# EAGLE board sparkfun-photon-redboard-Panel (EAGLE 9.6.2), part 1 of 3
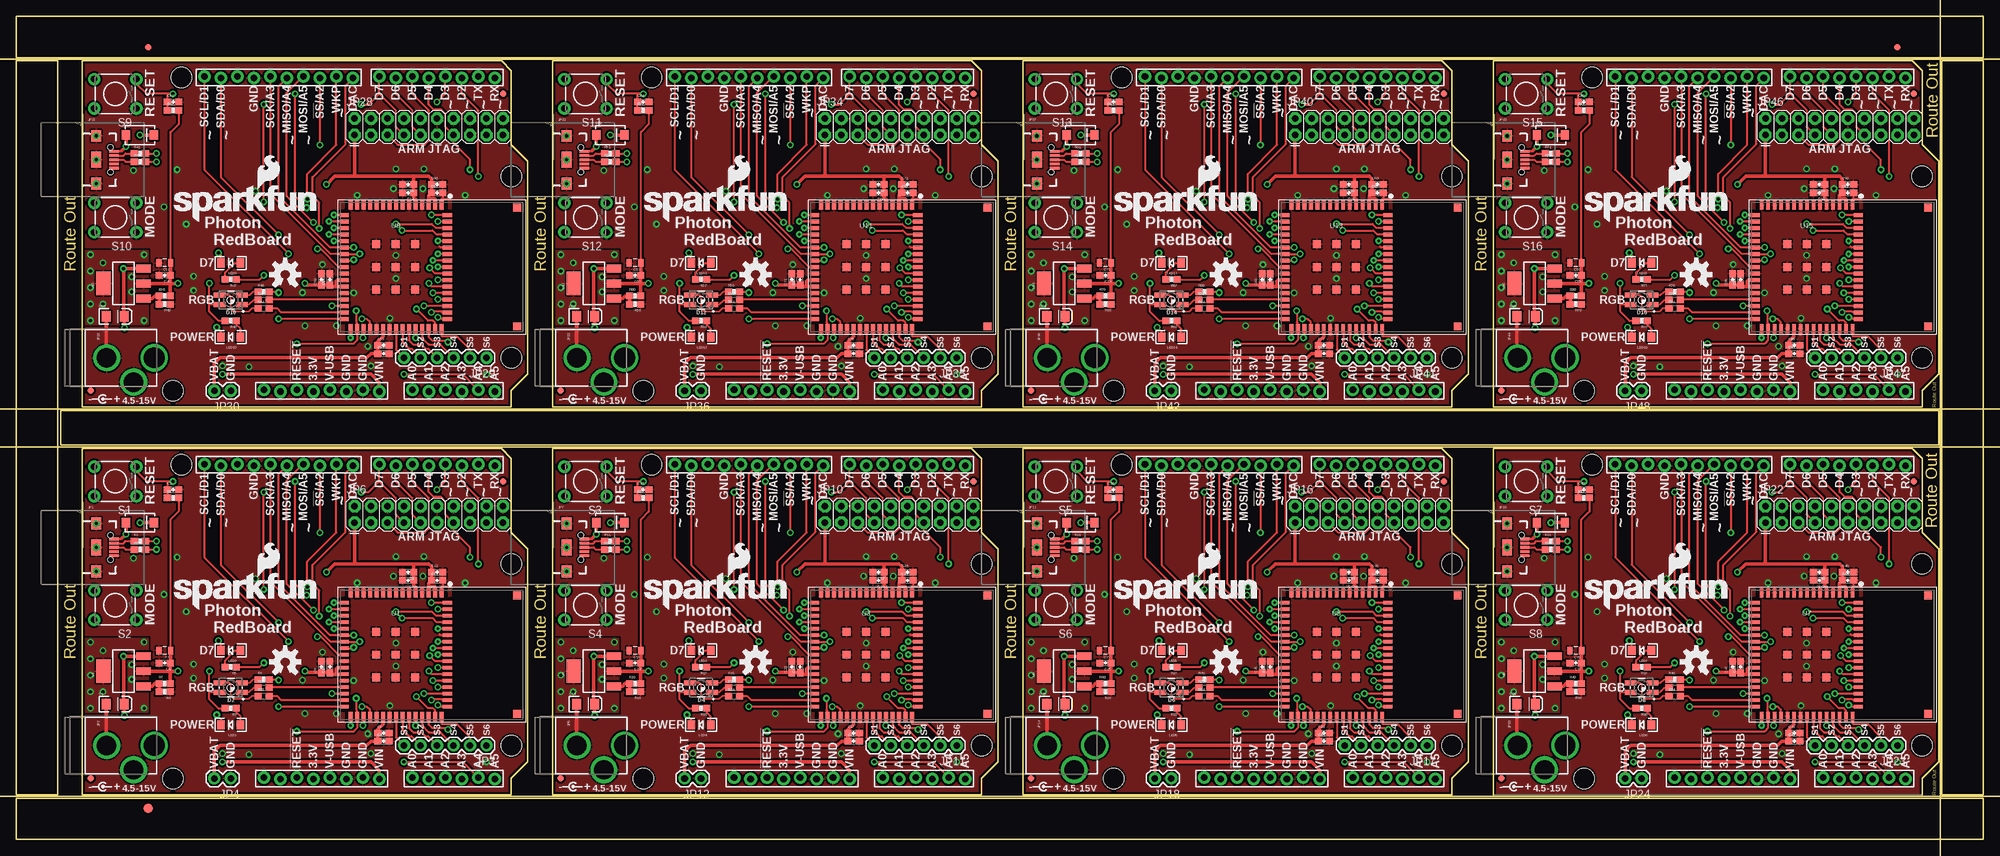
[diagram p0: board, top side]
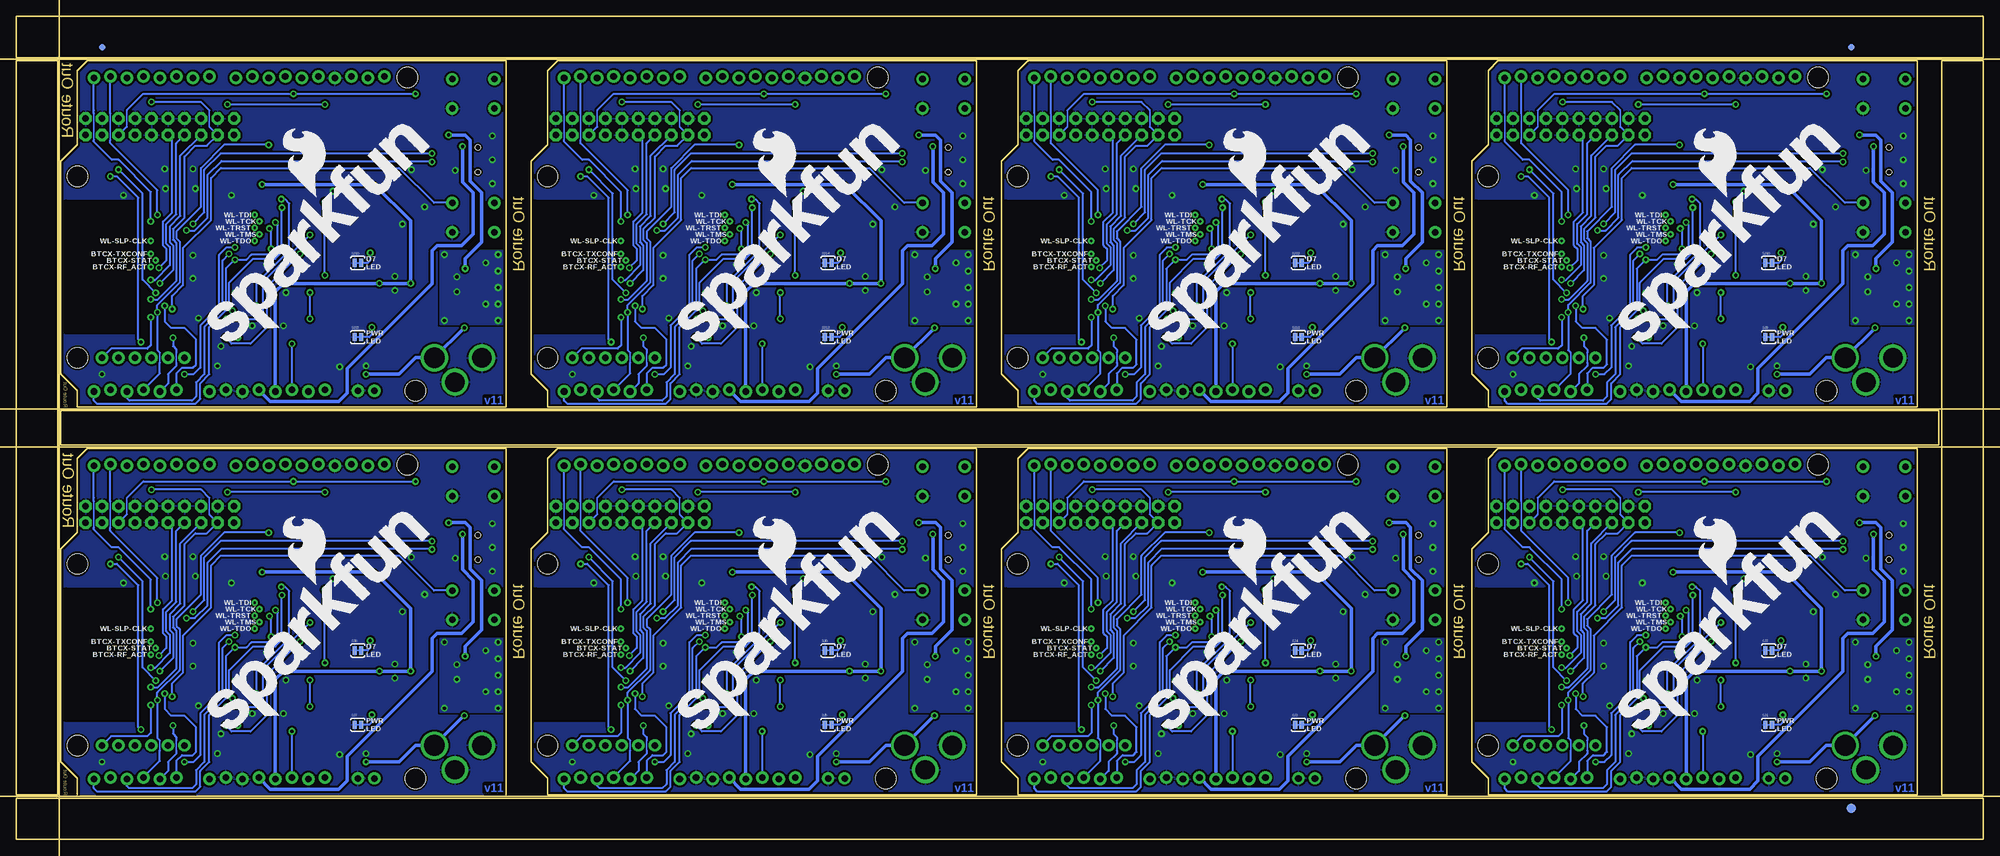
[diagram p1: board, bottom side, seen from below]

Size 302.77 x 126.75 mm. Coordinates in mm from the lower left corner, seen from the top.
Outline: 227.33,6.86 227.33,60.2 291.85,60.2 293.37,58.67 293.37,47.24 295.91,44.7 295.91,11.94 293.37,9.4 293.37,6.86
Outline: 10.16,6.86 10.16,60.2 74.68,60.2 76.2,58.67 76.2,47.24 78.74,44.7 78.74,11.94 76.2,9.4 76.2,6.86 10.16,6.86
Outline: 82.55,6.86 82.55,60.2 147.07,60.2 148.59,58.67 148.59,47.24 151.13,44.7 151.13,11.94 148.59,9.4 148.59,6.86 82.55,6.86
Outline: 154.94,6.86 154.94,60.2 219.46,60.2 220.98,58.67 220.98,47.24 223.52,44.7 223.52,11.94 220.98,9.4 220.98,6.86 154.94,6.86
Outline: 10.16,66.55 10.16,119.89 74.68,119.89 76.2,118.36 76.2,106.93 78.74,104.39 78.74,71.63 76.2,69.09 76.2,66.55 10.16,66.55
Outline: 82.55,66.55 82.55,119.89 147.07,119.89 148.59,118.36 148.59,106.93 151.13,104.39 151.13,71.63 148.59,69.09 148.59,66.55 82.55,66.55
Outline: 154.94,66.55 154.94,119.89 219.46,119.89 220.98,118.36 220.98,106.93 223.52,104.39 223.52,71.63 220.98,69.09 220.98,66.55 154.94,66.55
Outline: 227.33,66.55 227.33,119.89 291.85,119.89 293.37,118.36 293.37,106.93 295.91,104.39 295.91,71.63 293.37,69.09 293.37,66.55 227.33,66.55
Outline: 0,6.35 302.77,6.35 302.77,0 0,0 0,6.35
Outline: 296.42,119.89 302.77,119.89 302.77,6.86 296.42,6.86 296.42,119.89
Outline: 0,126.75 302.77,126.75 302.77,120.4 0,120.4 0,126.75
Outline: 0,119.89 6.35,119.89 6.35,6.86 0,6.86 0,119.89
Outline: 6.86,60.71 295.91,60.71 295.91,66.04 6.86,66.04 6.86,60.71
Copper layers (1*16): Top 0.035mm / dielectric 1.5mm / Bottom 0.035mm
Design rules "sparkfun-photon-redboard": minimum track width 7mil, minimum drill 10mil, track to track 8mil, track to pad 8mil, pad to pad 8mil, via to via 8mil, smd to smd 8mil, copper to edge 8mil, drill to drill 8mil, minimum pad ring 12mil, minimum via ring 10mil, stop-mask expansion 4mil, vias tented up to drill 20mil, thermal gap 10mil
Net classes: 0 default: width 0.203 mm
Milling: 5 lines

## Footprints (pad centres in the part's own frame; a part is rotated, then mirrored left to right if it is on the bottom)
EIA3216 = smd 1.4 x 1.6: A 1.4,0; C -1.4,0
0603-CAP = smd 1.1 x 1: 1 -0.85,0; 2 0.85,0
0805 = smd 0.8 x 1.2: 1 -0.9,0; 2 0.9,0
SMA-DIODE = smd 1.27 x 1.47: A -2.15,0; C 2.15,0
P-LCC-4-3 = smd 1.8 x 0.75: 1 -1.7,0.725; 2 -1.7,-0.725; 3 1.7,-0.725; 4 1.7,0.725
FIDUCIAL-1X2 = smd 1 x 1: 1 0,0
FIDUCIAL-1.5X3 = smd 1.5 x 1.5: 1 0,0
USB-B-MICRO-SMD_V03 = smd 1.45 x 0.4: D+1 2.725,0; D-1 2.725,0.65; GND1 2.725,-1.3; ID1 2.725,-0.65; VBUS1 2.725,1.3 | smd 1.5 x 1.8: SHIELD1 0,3.685; SHIELD2 0,-3.685 | smd 1.5 x 2.5: SHIELD3 0,0 | hole 0.85: 2.2,1.9; 2.2,-1.9
POWER_JACK_PTH_LOCK = drill 2.997 pad 4.115: GND 0.025,6.557; GNDBREAK 3.762,10.7 | drill 3.2 pad 4.115: PWR 0,13.878
1X06 = drill 1.016 pad 1.88: 1 0,0; 2 2.54,0; 3 5.08,0; 4 7.62,0; 5 10.16,0; 6 12.7,0
1X02 = drill 1.016 pad 1.88: 1 0,0; 2 2.54,0
ARDUINO_R3_NOISP_LOCKING = drill 1.016 pad 1.93: 3.3V 35.56,2.413; 5V 38.1,2.667; A0 50.8,2.667; A1 53.34,2.413; A2 55.88,2.667; A3 58.42,2.413; A4 60.96,2.667; A5 63.5,2.413; AREF 23.876,50.927; D0 63.5,50.673; D1 60.96,50.927; D2 58.42,50.673; D3 55.88,50.927; D4 53.34,50.673; D5 50.8,50.927; D6 48.26,50.673; D7 45.72,50.927; D8 41.656,50.673; D9 39.116,50.927; D10 36.576,50.673; D11 34.036,50.927; D12 31.496,50.673; D13 28.956,50.927; GND@1 40.64,2.413; GND@2 43.18,2.667; GND@3 26.416,50.673; IOREF 30.48,2.413; NC 27.94,2.667; RESET@1 33.02,2.667; SCL 18.796,50.927; SDA 21.336,50.673; VIN 45.72,2.413 | hole 3.175: 15.24,50.8; 66.04,35.56; 66.04,7.62; 13.97,2.54
2X10 = drill 1.016 pad 1.88 octagon: 1 -11.43,-1.27; 2 -11.43,1.27; 3 -8.89,-1.27; 4 -8.89,1.27; 5 -6.35,-1.27; 6 -6.35,1.27; 7 -3.81,-1.27; 8 -3.81,1.27; 9 -1.27,-1.27; 10 -1.27,1.27; 11 1.27,-1.27; 12 1.27,1.27; 13 3.81,-1.27; 14 3.81,1.27; 15 6.35,-1.27; 16 6.35,1.27; 17 8.89,-1.27; 18 8.89,1.27; 19 11.43,-1.27; 20 11.43,1.27
LED-1206 = smd 1.2 x 1.4: A -1.5,0; C 1.5,0
0603-RES = smd 1.1 x 1: 1 -0.85,0; 2 0.85,0
0603 = smd 1.1 x 1: 1 -0.85,0; 2 0.85,0
TACTILE-PTH = drill 1.016 pad 1.88: 1 -3.251,2.261; 2 3.251,2.261; 3 -3.251,-2.261; 4 3.251,-2.261
PAD-JUMPER-2-NC_BY_TRACE_YES_SILK = smd 0.635 x 1.27: 1 -0.508,0; 2 0.508,0
TP_15TH = drill 0.381 pad 0.61: P$1 0,0
WM-N-BM-14 = smd 0.6 x 1.4: 1 7.05,9.5; 2 6.05,9.5; 3 5.05,9.5; 4 4.05,9.5; 5 3.05,9.5; 6 2.05,9.5; 7 1.05,9.5; 8 0.05,9.5; 9 -0.95,9.5; 10 -1.95,9.5; 11 -2.95,9.5; 12 -3.95,9.5; 13 -4.95,9.5; 14 -5.95,9.5; 15 -6.95,9.5; 33 -6.95,-9.5; 34 -5.95,-9.5; 35 -4.95,-9.5; 36 -3.95,-9.5; 37 -2.95,-9.5; 38 -1.95,-9.5; 39 -0.95,-9.5; 40 0.05,-9.5; 41 1.05,-9.5; 42 2.05,-9.5; 43 3.05,-9.5; 44 4.05,-9.5; 45 5.05,-9.5; 46 6.05,-9.5; 47 7.05,-9.5 | smd 1.4 x 0.6: 16 -7.95,8; 17 -7.95,7; 18 -7.95,6; 19 -7.95,5; 20 -7.95,4; 21 -7.95,3; 22 -7.95,2; 23 -7.95,1; 24 -7.95,0; 25 -7.95,-1; 26 -7.95,-2; 27 -7.95,-3; 28 -7.95,-4; 29 -7.95,-5; 30 -7.95,-6; 31 -7.95,-7; 32 -7.95,-8; 48 7.95,-8; 49 7.95,-7; 50 7.95,-6; 51 7.95,-5; 52 7.95,-4; 53 7.95,-3; 54 7.95,-2; 55 7.95,-1; 56 7.95,0; 57 7.95,1; 58 7.95,2; 59 7.95,3; 60 7.95,4; 61 7.95,5; 62 7.95,6; 63 7.95,7; 64 7.95,8 | smd 1.2 x 1.2: 65 3,3.5; 66 0,3.5; 67 -3,3.5; 68 3,0; 69 0,0; 70 -3,0; 71 3,-3.5; 72 0,-3.5; 73 -3,-3.5; 74 18.67,-9.12; 75 18.67,9.12
SOT223 = smd 1.219 x 2.235: 1 -2.311,-3.099; 2 0,-3.099; 3 2.311,-3.099 | smd 3.6 x 2.2: 4 0,3.099

## Placement (x,y rotation side)
C1  10uF  [EIA3216]  15.24,20.83 0 top
C2  0.1uF  [0603-CAP]  24.13,53.85 0 top
C3  22uF  [0805]  22.86,29.08 180 top
C4  0.1uF  [0603-CAP]  22.86,27.18 180 top
C5  10uF  [0603-CAP]  56.52,16.38 0 top
C6  0.1uF  [0603-CAP]  56.52,15.11 0 top
C7  10uF  [0603-CAP]  60.33,39.88 180 top
C8  0.1uF  [0603-CAP]  60.33,41.15 180 top
C9  0.1uF  [0603-CAP]  46.99,26.54 90 top
C10  10uF  [0603-CAP]  48.26,26.54 90 top
C11  10uF  [0603-CAP]  64.77,39.88 0 top
C12  0.1uF  [0603-CAP]  64.77,41.15 0 top
C13  0.1uF  [0603-CAP]  95.25,27.18 180 top
C14  10uF  [EIA3216]  87.63,20.83 0 top
C15  22uF  [0805]  95.25,29.08 180 top
C16  0.1uF  [0603-CAP]  96.52,53.85 0 top
C17  10uF  [0603-CAP]  128.91,16.38 0 top
C18  10uF  [0603-CAP]  132.72,39.88 180 top
C19  10uF  [0603-CAP]  120.65,26.54 90 top
C20  10uF  [0603-CAP]  137.16,39.88 0 top
C21  0.1uF  [0603-CAP]  128.91,15.11 0 top
C22  0.1uF  [0603-CAP]  132.72,41.15 180 top
C23  0.1uF  [0603-CAP]  119.38,26.54 90 top
C24  0.1uF  [0603-CAP]  137.16,41.15 0 top
C25  0.1uF  [0603-CAP]  167.64,27.18 180 top
C26  10uF  [EIA3216]  160.02,20.83 0 top
C27  22uF  [0805]  167.64,29.08 180 top
C28  0.1uF  [0603-CAP]  168.91,53.85 0 top
C29  10uF  [0603-CAP]  201.29,16.38 0 top
C30  10uF  [0603-CAP]  205.1,39.88 180 top
C31  10uF  [0603-CAP]  193.04,26.54 90 top
C32  10uF  [0603-CAP]  209.55,39.88 0 top
C33  0.1uF  [0603-CAP]  201.29,15.11 0 top
C34  0.1uF  [0603-CAP]  205.1,41.15 180 top
C35  0.1uF  [0603-CAP]  191.77,26.54 90 top
C36  0.1uF  [0603-CAP]  209.55,41.15 0 top
C37  0.1uF  [0603-CAP]  240.03,27.18 180 top
C38  10uF  [EIA3216]  232.41,20.83 0 top
C39  22uF  [0805]  240.03,29.08 180 top
C40  0.1uF  [0603-CAP]  241.3,53.85 0 top
C41  10uF  [0603-CAP]  273.69,16.38 0 top
C42  10uF  [0603-CAP]  277.5,39.88 180 top
C43  10uF  [0603-CAP]  265.43,26.54 90 top
C44  10uF  [0603-CAP]  281.94,39.88 0 top
C45  0.1uF  [0603-CAP]  273.69,15.11 0 top
C46  0.1uF  [0603-CAP]  277.5,41.15 180 top
C47  0.1uF  [0603-CAP]  264.16,26.54 90 top
C48  0.1uF  [0603-CAP]  281.94,41.15 0 top
C49  0.1uF  [0603-CAP]  22.86,86.87 180 top
C50  10uF  [EIA3216]  15.24,80.52 0 top
C51  22uF  [0805]  22.86,88.77 180 top
C52  0.1uF  [0603-CAP]  24.13,113.54 0 top
C53  10uF  [0603-CAP]  56.52,76.07 0 top
C54  10uF  [0603-CAP]  60.33,99.57 180 top
C55  10uF  [0603-CAP]  48.26,86.23 90 top
C56  10uF  [0603-CAP]  64.77,99.57 0 top
C57  0.1uF  [0603-CAP]  56.52,74.8 0 top
C58  0.1uF  [0603-CAP]  60.33,100.84 180 top
C59  0.1uF  [0603-CAP]  46.99,86.23 90 top
C60  0.1uF  [0603-CAP]  64.77,100.84 0 top
C61  0.1uF  [0603-CAP]  95.25,86.87 180 top
C62  10uF  [EIA3216]  87.63,80.52 0 top
C63  22uF  [0805]  95.25,88.77 180 top
C64  0.1uF  [0603-CAP]  96.52,113.54 0 top
C65  10uF  [0603-CAP]  128.91,76.07 0 top
C66  10uF  [0603-CAP]  132.72,99.57 180 top
C67  10uF  [0603-CAP]  120.65,86.23 90 top
C68  10uF  [0603-CAP]  137.16,99.57 0 top
C69  0.1uF  [0603-CAP]  128.91,74.8 0 top
C70  0.1uF  [0603-CAP]  132.72,100.84 180 top
C71  0.1uF  [0603-CAP]  119.38,86.23 90 top
C72  0.1uF  [0603-CAP]  137.16,100.84 0 top
C73  0.1uF  [0603-CAP]  167.64,86.87 180 top
C74  10uF  [EIA3216]  160.02,80.52 0 top
C75  22uF  [0805]  167.64,88.77 180 top
C76  0.1uF  [0603-CAP]  168.91,113.54 0 top
C77  10uF  [0603-CAP]  201.29,76.07 0 top
C78  10uF  [0603-CAP]  205.1,99.57 180 top
C79  10uF  [0603-CAP]  193.04,86.23 90 top
C80  10uF  [0603-CAP]  209.55,99.57 0 top
C81  0.1uF  [0603-CAP]  201.29,74.8 0 top
C82  0.1uF  [0603-CAP]  205.1,100.84 180 top
C83  0.1uF  [0603-CAP]  191.77,86.23 90 top
C84  0.1uF  [0603-CAP]  209.55,100.84 0 top
C85  0.1uF  [0603-CAP]  240.03,86.87 180 top
C86  10uF  [EIA3216]  232.41,80.52 0 top
C87  22uF  [0805]  240.03,88.77 180 top
C88  0.1uF  [0603-CAP]  241.3,113.54 0 top
C89  10uF  [0603-CAP]  273.69,76.07 0 top
C90  10uF  [0603-CAP]  277.5,99.57 180 top
C91  10uF  [0603-CAP]  265.43,86.23 90 top
C92  10uF  [0603-CAP]  281.94,99.57 0 top
C93  0.1uF  [0603-CAP]  273.69,74.8 0 top
C94  0.1uF  [0603-CAP]  277.5,100.84 180 top
C95  0.1uF  [0603-CAP]  264.16,86.23 90 top
C96  0.1uF  [0603-CAP]  281.94,100.84 0 top
D1  MBRA140  [SMA-DIODE]  19.05,48.77 0 top
D2  RGB  [P-LCC-4-3]  33.02,23.37 180 top
D3  MBRA140  [SMA-DIODE]  91.44,48.77 0 top
D4  RGB  [P-LCC-4-3]  105.41,23.37 180 top
D5  MBRA140  [SMA-DIODE]  163.83,48.77 0 top
D6  RGB  [P-LCC-4-3]  177.8,23.37 180 top
D7  MBRA140  [SMA-DIODE]  236.22,48.77 0 top
D8  RGB  [P-LCC-4-3]  250.19,23.37 180 top
D9  MBRA140  [SMA-DIODE]  19.05,108.46 0 top
D10  RGB  [P-LCC-4-3]  33.02,83.06 180 top
D11  MBRA140  [SMA-DIODE]  91.44,108.46 0 top
D12  RGB  [P-LCC-4-3]  105.41,83.06 180 top
D13  MBRA140  [SMA-DIODE]  163.83,108.46 0 top
D14  RGB  [P-LCC-4-3]  177.8,83.06 180 top
D15  MBRA140  [SMA-DIODE]  236.22,108.46 0 top
D16  RGB  [P-LCC-4-3]  250.19,83.06 180 top
E$1  [FIDUCIAL-1X2]  20.32,121.98 0 top
E$2  [FIDUCIAL-1X2]  20.32,121.98 0 bottom
E$3  [FIDUCIAL-1X2]  289.56,121.98 0 top
E$4  [FIDUCIAL-1X2]  289.56,121.98 0 bottom
E$5  [FIDUCIAL-1.5X3]  20.32,4.76 0 top
E$6  [FIDUCIAL-1.5X3]  20.32,4.76 0 bottom
FID1  FIDUCIAL1X2  [FIDUCIAL-1X2]  74.93,55.12 0 top
FID2  FIDUCIAL1X2  [FIDUCIAL-1X2]  11.43,9.4 0 top
FID3  FIDUCIAL1X2  [FIDUCIAL-1X2]  83.82,9.4 0 top
FID4  FIDUCIAL1X2  [FIDUCIAL-1X2]  147.32,55.12 0 top
FID5  FIDUCIAL1X2  [FIDUCIAL-1X2]  156.21,9.4 0 top
FID6  FIDUCIAL1X2  [FIDUCIAL-1X2]  219.71,55.12 0 top
FID7  FIDUCIAL1X2  [FIDUCIAL-1X2]  228.6,9.4 0 top
FID8  FIDUCIAL1X2  [FIDUCIAL-1X2]  292.1,55.12 0 top
FID9  FIDUCIAL1X2  [FIDUCIAL-1X2]  11.43,69.09 0 top
FID10  FIDUCIAL1X2  [FIDUCIAL-1X2]  74.93,114.81 0 top
FID11  FIDUCIAL1X2  [FIDUCIAL-1X2]  83.82,69.09 0 top
FID12  FIDUCIAL1X2  [FIDUCIAL-1X2]  147.32,114.81 0 top
FID13  FIDUCIAL1X2  [FIDUCIAL-1X2]  156.21,69.09 0 top
FID14  FIDUCIAL1X2  [FIDUCIAL-1X2]  219.71,114.81 0 top
FID15  FIDUCIAL1X2  [FIDUCIAL-1X2]  228.6,69.09 0 top
FID16  FIDUCIAL1X2  [FIDUCIAL-1X2]  292.1,114.81 0 top
JP1  USB  [USB-B-MICRO-SMD_V03]  12.32,44.96 0 top
JP2  POWER  [POWER_JACK_PTH_LOCK]  7.37,14.48 270 top
JP3  DNP  [1X06]  72.39,14.48 180 top
JP4  DNP  [1X02]  33.02,9.4 180 top
JP5  ARDUINO_R3_NOISPLOCKING  [ARDUINO_R3_NOISP_LOCKING]  10.16,6.86 0 top
JP6  DNP  [2X10]  63.5,50.04 0 top
JP7  USB  [USB-B-MICRO-SMD_V03]  84.71,44.96 0 top
JP8  POWER  [POWER_JACK_PTH_LOCK]  79.76,14.48 270 top
JP9  ARDUINO_R3_NOISPLOCKING  [ARDUINO_R3_NOISP_LOCKING]  82.55,6.86 0 top
JP10  DNP  [2X10]  135.89,50.04 0 top
JP11  DNP  [1X06]  144.78,14.48 180 top
JP12  DNP  [1X02]  105.41,9.4 180 top
JP13  USB  [USB-B-MICRO-SMD_V03]  157.1,44.96 0 top
JP14  POWER  [POWER_JACK_PTH_LOCK]  152.15,14.48 270 top
JP15  ARDUINO_R3_NOISPLOCKING  [ARDUINO_R3_NOISP_LOCKING]  154.94,6.86 0 top
JP16  DNP  [2X10]  208.28,50.04 0 top
JP17  DNP  [1X06]  217.17,14.48 180 top
JP18  DNP  [1X02]  177.8,9.4 180 top
JP19  USB  [USB-B-MICRO-SMD_V03]  229.49,44.96 0 top
JP20  POWER  [POWER_JACK_PTH_LOCK]  224.54,14.48 270 top
JP21  ARDUINO_R3_NOISPLOCKING  [ARDUINO_R3_NOISP_LOCKING]  227.33,6.86 0 top
JP22  DNP  [2X10]  280.67,50.04 0 top
JP23  DNP  [1X06]  289.56,14.48 180 top
JP24  DNP  [1X02]  250.19,9.4 180 top
JP25  USB  [USB-B-MICRO-SMD_V03]  12.32,104.65 0 top
JP26  POWER  [POWER_JACK_PTH_LOCK]  7.37,74.17 270 top
JP27  ARDUINO_R3_NOISPLOCKING  [ARDUINO_R3_NOISP_LOCKING]  10.16,66.55 0 top
JP28  DNP  [2X10]  63.5,109.73 0 top
JP29  DNP  [1X06]  72.39,74.17 180 top
JP30  DNP  [1X02]  33.02,69.09 180 top
JP31  USB  [USB-B-MICRO-SMD_V03]  84.71,104.65 0 top
JP32  POWER  [POWER_JACK_PTH_LOCK]  79.76,74.17 270 top
JP33  ARDUINO_R3_NOISPLOCKING  [ARDUINO_R3_NOISP_LOCKING]  82.55,66.55 0 top
JP34  DNP  [2X10]  135.89,109.73 0 top
JP35  DNP  [1X06]  144.78,74.17 180 top
JP36  DNP  [1X02]  105.41,69.09 180 top
JP37  USB  [USB-B-MICRO-SMD_V03]  157.1,104.65 0 top
JP38  POWER  [POWER_JACK_PTH_LOCK]  152.15,74.17 270 top
JP39  ARDUINO_R3_NOISPLOCKING  [ARDUINO_R3_NOISP_LOCKING]  154.94,66.55 0 top
JP40  DNP  [2X10]  208.28,109.73 0 top
JP41  DNP  [1X06]  217.17,74.17 180 top
JP42  DNP  [1X02]  177.8,69.09 180 top
JP43  USB  [USB-B-MICRO-SMD_V03]  229.49,104.65 0 top
JP44  POWER  [POWER_JACK_PTH_LOCK]  224.54,74.17 270 top
JP45  ARDUINO_R3_NOISPLOCKING  [ARDUINO_R3_NOISP_LOCKING]  227.33,66.55 0 top
JP46  DNP  [2X10]  280.67,109.73 0 top
JP47  DNP  [1X06]  289.56,74.17 180 top
JP48  DNP  [1X02]  250.19,69.09 180 top
LED1  RED  [LED-1206]  33.02,17.65 180 top
LED2  BLUE  [LED-1206]  33.02,29.08 180 top
LED3  BLUE  [LED-1206]  105.41,29.08 180 top
LED4  RED  [LED-1206]  105.41,17.65 180 top
LED5  BLUE  [LED-1206]  177.8,29.08 180 top
LED6  RED  [LED-1206]  177.8,17.65 180 top
LED7  BLUE  [LED-1206]  250.19,29.08 180 top
LED8  RED  [LED-1206]  250.19,17.65 180 top
LED9  BLUE  [LED-1206]  33.02,88.77 180 top
LED10  RED  [LED-1206]  33.02,77.34 180 top
LED11  BLUE  [LED-1206]  105.41,88.77 180 top
LED12  RED  [LED-1206]  105.41,77.34 180 top
LED13  BLUE  [LED-1206]  177.8,88.77 180 top
LED14  RED  [LED-1206]  177.8,77.34 180 top
LED15  BLUE  [LED-1206]  250.19,88.77 180 top
LED16  RED  [LED-1206]  250.19,77.34 180 top
LOGO1  OSHW-LOGOM  [OSHW-LOGO-M]  41.4,27.3 0 top
LOGO2  SFE_LOGO_NAME_FLAME.2_INCH  [SFE_LOGO_NAME_FLAME_.2]  23.62,35.31 0 top
LOGO3  SFE_LOGO_NAME_FLAME.4_INCH  [SFE_LOGO_NAME_FLAME_.4]  50.8,13.21 45 bottom
LOGO4  SFE_LOGO_NAME_FLAME.2_INCH  [SFE_LOGO_NAME_FLAME_.2]  96.01,35.31 0 top
LOGO5  OSHW-LOGOM  [OSHW-LOGO-M]  113.79,27.3 0 top
LOGO6  SFE_LOGO_NAME_FLAME.4_INCH  [SFE_LOGO_NAME_FLAME_.4]  123.19,13.21 45 bottom
LOGO7  SFE_LOGO_NAME_FLAME.2_INCH  [SFE_LOGO_NAME_FLAME_.2]  168.4,35.31 0 top
LOGO8  OSHW-LOGOM  [OSHW-LOGO-M]  186.18,27.3 0 top
LOGO9  SFE_LOGO_NAME_FLAME.4_INCH  [SFE_LOGO_NAME_FLAME_.4]  195.58,13.21 45 bottom
LOGO10  SFE_LOGO_NAME_FLAME.2_INCH  [SFE_LOGO_NAME_FLAME_.2]  240.79,35.31 0 top
LOGO11  OSHW-LOGOM  [OSHW-LOGO-M]  258.57,27.3 0 top
LOGO12  SFE_LOGO_NAME_FLAME.4_INCH  [SFE_LOGO_NAME_FLAME_.4]  267.97,13.21 45 bottom
LOGO13  SFE_LOGO_NAME_FLAME.2_INCH  [SFE_LOGO_NAME_FLAME_.2]  23.62,95 0 top
LOGO14  OSHW-LOGOM  [OSHW-LOGO-M]  41.4,87 0 top
LOGO15  SFE_LOGO_NAME_FLAME.4_INCH  [SFE_LOGO_NAME_FLAME_.4]  50.8,72.9 45 bottom
LOGO16  SFE_LOGO_NAME_FLAME.2_INCH  [SFE_LOGO_NAME_FLAME_.2]  96.01,95 0 top
LOGO17  OSHW-LOGOM  [OSHW-LOGO-M]  113.79,87 0 top
LOGO18  SFE_LOGO_NAME_FLAME.4_INCH  [SFE_LOGO_NAME_FLAME_.4]  123.19,72.9 45 bottom
LOGO19  SFE_LOGO_NAME_FLAME.2_INCH  [SFE_LOGO_NAME_FLAME_.2]  168.4,95 0 top
LOGO20  OSHW-LOGOM  [OSHW-LOGO-M]  186.18,87 0 top
LOGO21  SFE_LOGO_NAME_FLAME.4_INCH  [SFE_LOGO_NAME_FLAME_.4]  195.58,72.9 45 bottom
LOGO22  SFE_LOGO_NAME_FLAME.2_INCH  [SFE_LOGO_NAME_FLAME_.2]  240.79,95 0 top
LOGO23  OSHW-LOGOM  [OSHW-LOGO-M]  258.57,87 0 top
LOGO24  SFE_LOGO_NAME_FLAME.4_INCH  [SFE_LOGO_NAME_FLAME_.4]  267.97,72.9 45 bottom
R1  22  [0603-RES]  19.05,45.92 0 top
R2  22  [0603-RES]  19.05,44.65 0 top
R3  1K  [0603-RES]  33.02,20.19 180 top
R4  390  [0603-RES]  22.86,22.73 180 top
R5  300  [0603-RES]  33.02,26.54 180 top
R6  10K  [0603-RES]  24.13,52.58 0 top
R7  240  [0603-RES]  22.86,24 0 top
R8  100  [0603-RES]  38.1,24.64 0 top
R9  220  [0603]  38.1,23.37 0 top
R10  100  [0603]  38.1,22.1 0 top
R11  22  [0603-RES]  91.44,45.92 0 top
R12  22  [0603-RES]  91.44,44.65 0 top
R13  10K  [0603-RES]  96.52,52.58 0 top
R14  100  [0603]  110.49,22.1 0 top
R15  220  [0603]  110.49,23.37 0 top
R16  100  [0603-RES]  110.49,24.64 0 top
R17  300  [0603-RES]  105.41,26.54 180 top
R18  1K  [0603-RES]  105.41,20.19 180 top
R19  390  [0603-RES]  95.25,22.73 180 top
R20  240  [0603-RES]  95.25,24 0 top
R21  22  [0603-RES]  163.83,45.92 0 top
R22  22  [0603-RES]  163.83,44.65 0 top
R23  10K  [0603-RES]  168.91,52.58 0 top
R24  100  [0603]  182.88,22.1 0 top
R25  220  [0603]  182.88,23.37 0 top
R26  100  [0603-RES]  182.88,24.64 0 top
R27  300  [0603-RES]  177.8,26.54 180 top
R28  1K  [0603-RES]  177.8,20.19 180 top
R29  390  [0603-RES]  167.64,22.73 180 top
R30  240  [0603-RES]  167.64,24 0 top
R31  22  [0603-RES]  236.22,45.92 0 top
R32  22  [0603-RES]  236.22,44.65 0 top
R33  10K  [0603-RES]  241.3,52.58 0 top
R34  100  [0603]  255.27,22.1 0 top
R35  220  [0603]  255.27,23.37 0 top
R36  100  [0603-RES]  255.27,24.64 0 top
R37  300  [0603-RES]  250.19,26.54 180 top
R38  1K  [0603-RES]  250.19,20.19 180 top
R39  390  [0603-RES]  240.03,22.73 180 top
R40  240  [0603-RES]  240.03,24 0 top
R41  22  [0603-RES]  19.05,105.61 0 top
R42  22  [0603-RES]  19.05,104.34 0 top
R43  10K  [0603-RES]  24.13,112.27 0 top
R44  100  [0603]  38.1,81.79 0 top
R45  220  [0603]  38.1,83.06 0 top
R46  100  [0603-RES]  38.1,84.33 0 top
R47  300  [0603-RES]  33.02,86.23 180 top
R48  1K  [0603-RES]  33.02,79.88 180 top
R49  390  [0603-RES]  22.86,82.42 180 top
R50  240  [0603-RES]  22.86,83.69 0 top
R51  22  [0603-RES]  91.44,105.61 0 top
R52  22  [0603-RES]  91.44,104.34 0 top
R53  10K  [0603-RES]  96.52,112.27 0 top
R54  100  [0603]  110.49,81.79 0 top
R55  220  [0603]  110.49,83.06 0 top
R56  100  [0603-RES]  110.49,84.33 0 top
R57  300  [0603-RES]  105.41,86.23 180 top
R58  1K  [0603-RES]  105.41,79.88 180 top
R59  390  [0603-RES]  95.25,82.42 180 top
R60  240  [0603-RES]  95.25,83.69 0 top
R61  22  [0603-RES]  163.83,105.61 0 top
R62  22  [0603-RES]  163.83,104.34 0 top
R63  10K  [0603-RES]  168.91,112.27 0 top
R64  100  [0603]  182.88,81.79 0 top
R65  220  [0603]  182.88,83.06 0 top
R66  100  [0603-RES]  182.88,84.33 0 top
R67  300  [0603-RES]  177.8,86.23 180 top
R68  1K  [0603-RES]  177.8,79.88 180 top
R69  390  [0603-RES]  167.64,82.42 180 top
R70  240  [0603-RES]  167.64,83.69 0 top
R71  22  [0603-RES]  236.22,105.61 0 top
R72  22  [0603-RES]  236.22,104.34 0 top
R73  10K  [0603-RES]  241.3,112.27 0 top
R74  100  [0603]  255.27,81.79 0 top
R75  220  [0603]  255.27,83.06 0 top
R76  100  [0603-RES]  255.27,84.33 0 top
R77  300  [0603-RES]  250.19,86.23 180 top
R78  1K  [0603-RES]  250.19,79.88 180 top
R79  390  [0603-RES]  240.03,82.42 180 top
R80  240  [0603-RES]  240.03,83.69 0 top
S1  RESET  [TACTILE-PTH]  15.24,55.12 180 top
S2  MODE  [TACTILE-PTH]  15.24,36.07 180 top
S3  RESET  [TACTILE-PTH]  87.63,55.12 180 top
S4  MODE  [TACTILE-PTH]  87.63,36.07 180 top
S5  RESET  [TACTILE-PTH]  160.02,55.12 180 top
S6  MODE  [TACTILE-PTH]  160.02,36.07 180 top
S7  RESET  [TACTILE-PTH]  232.41,55.12 180 top
S8  MODE  [TACTILE-PTH]  232.41,36.07 180 top
S9  RESET  [TACTILE-PTH]  15.24,114.81 180 top
S10  MODE  [TACTILE-PTH]  15.24,95.76 180 top
S11  RESET  [TACTILE-PTH]  87.63,114.81 180 top
S12  MODE  [TACTILE-PTH]  87.63,95.76 180 top
S13  RESET  [TACTILE-PTH]  160.02,114.81 180 top
S14  MODE  [TACTILE-PTH]  160.02,95.76 180 top
S15  RESET  [TACTILE-PTH]  232.41,114.81 180 top
S16  MODE  [TACTILE-PTH]  232.41,95.76 180 top
SJ1  PWR-LED  [PAD-JUMPER-2-NC_BY_TRACE_YES_SILK]  33.02,17.65 0 bottom
SJ2  D7-LED  [PAD-JUMPER-2-NC_BY_TRACE_YES_SILK]  33.02,29.08 0 bottom
SJ3  PWR-LED  [PAD-JUMPER-2-NC_BY_TRACE_YES_SILK]  105.41,17.65 0 bottom
SJ4  D7-LED  [PAD-JUMPER-2-NC_BY_TRACE_YES_SILK]  105.41,29.08 0 bottom
SJ5  PWR-LED  [PAD-JUMPER-2-NC_BY_TRACE_YES_SILK]  177.8,17.65 0 bottom
SJ6  D7-LED  [PAD-JUMPER-2-NC_BY_TRACE_YES_SILK]  177.8,29.08 0 bottom
SJ7  PWR-LED  [PAD-JUMPER-2-NC_BY_TRACE_YES_SILK]  250.19,17.65 0 bottom
SJ8  D7-LED  [PAD-JUMPER-2-NC_BY_TRACE_YES_SILK]  250.19,29.08 0 bottom
SJ9  PWR-LED  [PAD-JUMPER-2-NC_BY_TRACE_YES_SILK]  33.02,77.34 0 bottom
SJ10  D7-LED  [PAD-JUMPER-2-NC_BY_TRACE_YES_SILK]  33.02,88.77 0 bottom
SJ11  PWR-LED  [PAD-JUMPER-2-NC_BY_TRACE_YES_SILK]  105.41,77.34 0 bottom
SJ12  D7-LED  [PAD-JUMPER-2-NC_BY_TRACE_YES_SILK]  105.41,88.77 0 bottom
SJ13  PWR-LED  [PAD-JUMPER-2-NC_BY_TRACE_YES_SILK]  177.8,77.34 0 bottom
SJ14  D7-LED  [PAD-JUMPER-2-NC_BY_TRACE_YES_SILK]  177.8,88.77 0 bottom
SJ15  PWR-LED  [PAD-JUMPER-2-NC_BY_TRACE_YES_SILK]  250.19,77.34 0 bottom
SJ16  D7-LED  [PAD-JUMPER-2-NC_BY_TRACE_YES_SILK]  250.19,88.77 0 bottom
TP1  TEST-POINTTP_15TH_THRU  [TP_15TH]  64.9,30.45 180 top
TP2  TEST-POINTTP_15TH_THRU  [TP_15TH]  64.9,28.45 180 top
TP3  TEST-POINTTP_15TH_THRU  [TP_15TH]  64.14,29.45 180 top
TP4  TEST-POINTTP_15TH_THRU  [TP_15TH]  48.89,36.45 0 top
TP5  TEST-POINTTP_15TH_THRU  [TP_15TH]  48.13,35.45 270 top
TP6  TEST-POINTTP_15TH_THRU  [TP_15TH]  48.89,34.45 0 top
TP7  TEST-POINTTP_15TH_THRU  [TP_15TH]  48.13,33.45 0 top
TP8  TEST-POINTTP_15TH_THRU  [TP_15TH]  48.89,32.45 0 top
TP9  TEST-POINTTP_15TH_THRU  [TP_15TH]  64.9,32.45 0 top
TP10  TEST-POINTTP_15TH_THRU  [TP_15TH]  51.47,17.53 0 top
TP11  TEST-POINTTP_15TH_THRU  [TP_15TH]  136.53,29.45 180 top
TP12  TEST-POINTTP_15TH_THRU  [TP_15TH]  137.29,30.45 180 top
TP13  TEST-POINTTP_15TH_THRU  [TP_15TH]  137.29,28.45 180 top
TP14  TEST-POINTTP_15TH_THRU  [TP_15TH]  121.28,36.45 0 top
TP15  TEST-POINTTP_15TH_THRU  [TP_15TH]  120.52,35.45 270 top
TP16  TEST-POINTTP_15TH_THRU  [TP_15TH]  121.28,34.45 0 top
TP17  TEST-POINTTP_15TH_THRU  [TP_15TH]  120.52,33.45 0 top
TP18  TEST-POINTTP_15TH_THRU  [TP_15TH]  121.28,32.45 0 top
TP19  TEST-POINTTP_15TH_THRU  [TP_15TH]  137.29,32.45 0 top
TP20  TEST-POINTTP_15TH_THRU  [TP_15TH]  123.86,17.53 0 top
TP21  TEST-POINTTP_15TH_THRU  [TP_15TH]  208.91,29.45 180 top
TP22  TEST-POINTTP_15TH_THRU  [TP_15TH]  209.68,30.45 180 top
TP23  TEST-POINTTP_15TH_THRU  [TP_15TH]  209.68,28.45 180 top
TP24  TEST-POINTTP_15TH_THRU  [TP_15TH]  193.67,36.45 0 top
TP25  TEST-POINTTP_15TH_THRU  [TP_15TH]  192.91,35.45 270 top
TP26  TEST-POINTTP_15TH_THRU  [TP_15TH]  193.67,34.45 0 top
TP27  TEST-POINTTP_15TH_THRU  [TP_15TH]  192.91,33.45 0 top
TP28  TEST-POINTTP_15TH_THRU  [TP_15TH]  193.67,32.45 0 top
TP29  TEST-POINTTP_15TH_THRU  [TP_15TH]  209.68,32.45 0 top
TP30  TEST-POINTTP_15TH_THRU  [TP_15TH]  196.25,17.53 0 top
TP31  TEST-POINTTP_15TH_THRU  [TP_15TH]  281.31,29.45 180 top
TP32  TEST-POINTTP_15TH_THRU  [TP_15TH]  282.07,30.45 180 top
TP33  TEST-POINTTP_15TH_THRU  [TP_15TH]  282.07,28.45 180 top
TP34  TEST-POINTTP_15TH_THRU  [TP_15TH]  266.06,36.45 0 top
TP35  TEST-POINTTP_15TH_THRU  [TP_15TH]  265.3,35.45 270 top
TP36  TEST-POINTTP_15TH_THRU  [TP_15TH]  266.06,34.45 0 top
TP37  TEST-POINTTP_15TH_THRU  [TP_15TH]  265.3,33.45 0 top
TP38  TEST-POINTTP_15TH_THRU  [TP_15TH]  266.06,32.45 0 top
TP39  TEST-POINTTP_15TH_THRU  [TP_15TH]  282.07,32.45 0 top
TP40  TEST-POINTTP_15TH_THRU  [TP_15TH]  268.64,17.53 0 top
TP41  TEST-POINTTP_15TH_THRU  [TP_15TH]  64.14,89.14 180 top
TP42  TEST-POINTTP_15TH_THRU  [TP_15TH]  64.9,90.14 180 top
TP43  TEST-POINTTP_15TH_THRU  [TP_15TH]  64.9,88.14 180 top
TP44  TEST-POINTTP_15TH_THRU  [TP_15TH]  48.89,96.14 0 top
TP45  TEST-POINTTP_15TH_THRU  [TP_15TH]  48.13,95.14 270 top
TP46  TEST-POINTTP_15TH_THRU  [TP_15TH]  48.89,94.14 0 top
TP47  TEST-POINTTP_15TH_THRU  [TP_15TH]  48.13,93.14 0 top
TP48  TEST-POINTTP_15TH_THRU  [TP_15TH]  48.89,92.14 0 top
TP49  TEST-POINTTP_15TH_THRU  [TP_15TH]  64.9,92.14 0 top
TP50  TEST-POINTTP_15TH_THRU  [TP_15TH]  51.47,77.22 0 top
TP51  TEST-POINTTP_15TH_THRU  [TP_15TH]  136.53,89.14 180 top
TP52  TEST-POINTTP_15TH_THRU  [TP_15TH]  137.29,90.14 180 top
TP53  TEST-POINTTP_15TH_THRU  [TP_15TH]  137.29,88.14 180 top
TP54  TEST-POINTTP_15TH_THRU  [TP_15TH]  121.28,96.14 0 top
TP55  TEST-POINTTP_15TH_THRU  [TP_15TH]  120.52,95.14 270 top
TP56  TEST-POINTTP_15TH_THRU  [TP_15TH]  121.28,94.14 0 top
TP57  TEST-POINTTP_15TH_THRU  [TP_15TH]  120.52,93.14 0 top
TP58  TEST-POINTTP_15TH_THRU  [TP_15TH]  121.28,92.14 0 top
TP59  TEST-POINTTP_15TH_THRU  [TP_15TH]  137.29,92.14 0 top
TP60  TEST-POINTTP_15TH_THRU  [TP_15TH]  123.86,77.22 0 top
TP61  TEST-POINTTP_15TH_THRU  [TP_15TH]  208.91,89.14 180 top
TP62  TEST-POINTTP_15TH_THRU  [TP_15TH]  209.68,90.14 180 top
TP63  TEST-POINTTP_15TH_THRU  [TP_15TH]  209.68,88.14 180 top
TP64  TEST-POINTTP_15TH_THRU  [TP_15TH]  193.67,96.14 0 top
TP65  TEST-POINTTP_15TH_THRU  [TP_15TH]  192.91,95.14 270 top
TP66  TEST-POINTTP_15TH_THRU  [TP_15TH]  193.67,94.14 0 top
TP67  TEST-POINTTP_15TH_THRU  [TP_15TH]  192.91,93.14 0 top
TP68  TEST-POINTTP_15TH_THRU  [TP_15TH]  193.67,92.14 0 top
TP69  TEST-POINTTP_15TH_THRU  [TP_15TH]  209.68,92.14 0 top
TP70  TEST-POINTTP_15TH_THRU  [TP_15TH]  196.25,77.22 0 top
TP71  TEST-POINTTP_15TH_THRU  [TP_15TH]  281.31,89.14 180 top
TP72  TEST-POINTTP_15TH_THRU  [TP_15TH]  282.07,90.14 180 top
TP73  TEST-POINTTP_15TH_THRU  [TP_15TH]  282.07,88.14 180 top
TP74  TEST-POINTTP_15TH_THRU  [TP_15TH]  266.06,96.14 0 top
TP75  TEST-POINTTP_15TH_THRU  [TP_15TH]  265.3,95.14 270 top
TP76  TEST-POINTTP_15TH_THRU  [TP_15TH]  266.06,94.14 0 top
TP77  TEST-POINTTP_15TH_THRU  [TP_15TH]  265.3,93.14 0 top
TP78  TEST-POINTTP_15TH_THRU  [TP_15TH]  266.06,92.14 0 top
TP79  TEST-POINTTP_15TH_THRU  [TP_15TH]  282.07,92.14 0 top
TP80  TEST-POINTTP_15TH_THRU  [TP_15TH]  268.64,77.22 0 top
U1  WM-N-BM-14  [WM-N-BM-14]  58.42,28.45 0 top
U2  [SOT223]  16.51,25.91 90 top
U3  WM-N-BM-14  [WM-N-BM-14]  130.81,28.45 0 top
U4  [SOT223]  88.9,25.91 90 top
U5  WM-N-BM-14  [WM-N-BM-14]  203.2,28.45 0 top
U6  [SOT223]  161.29,25.91 90 top
U7  WM-N-BM-14  [WM-N-BM-14]  275.59,28.45 0 top
U8  [SOT223]  233.68,25.91 90 top
U9  WM-N-BM-14  [WM-N-BM-14]  58.42,88.14 0 top
U10  [SOT223]  16.51,85.6 90 top
U11  WM-N-BM-14  [WM-N-BM-14]  130.81,88.14 0 top
U12  [SOT223]  88.9,85.6 90 top
U13  WM-N-BM-14  [WM-N-BM-14]  203.2,88.14 0 top
U14  [SOT223]  161.29,85.6 90 top
U15  WM-N-BM-14  [WM-N-BM-14]  275.59,88.14 0 top
U16  [SOT223]  233.68,85.6 90 top

## Library data of the parts
C1 C14 C26 C38 C50 C62 C74 C86 = SparkFun-Capacitors; PROD_ID: CAP-00811
C2 C4 C6 C8 C9 C12 C13 C16 C21-C25 C28 C33-C37 C40 C45-C49 C52 C57-C61 C64 C69-C73 C76 C81-C85 C88 C93-C96 = SparkFun-Capacitors; PROD_ID: CAP-00810
C3 C15 C27 C39 C51 C63 C75 C87 = SparkFun-Capacitors; PROD_ID: CAP-08402
C5 C7 C10 C11 C17-C20 C29-C32 C41-C44 C53-C56 C65-C68 C77-C80 C89-C92 = SparkFun-Capacitors; PROD_ID: CAP-11015
D1 D3 D5 D7 D9 D11 D13 D15 = SparkFun-DiscreteSemi; PROD_ID: DIO-08053
D2 D4 D6 D8 D10 D12 D14 D16 = SparkFun-LED; PROD_ID: DIO-12986
E$1-E$4 FID1-FID16 LOGO1-LOGO24 = SparkFun-Aesthetics
E$5 E$6 = SparkFun-Retired
JP1 JP7 JP13 JP19 JP25 JP31 JP37 JP43 = SparkFun-Connectors; PROD_ID: CONN-11752
JP2 JP8 JP14 JP20 JP26 JP32 JP38 JP44 = SparkFun-Connectors; PROD_ID: CONN-08197; SF_ID: PRT-00119
JP3 JP11 JP17 JP23 JP29 JP35 JP41 JP47 = SparkFun-Connectors; PROD_ID: CONN-08437
JP4 JP6 JP10 JP12 JP16 JP18 JP22 JP24 JP28 JP30 JP34 JP36 JP40 JP42 JP46 JP48 = SparkFun-Connectors
JP5 JP9 JP15 JP21 JP27 JP33 JP39 JP45 = sparkfun_photon_temp
LED1 LED4 LED6 LED8 LED10 LED12 LED14 LED16 = SparkFun-LED; PROD_ID: DIO-00809
LED2 LED3 LED5 LED7 LED9 LED11 LED13 LED15 = SparkFun-LED; PROD_ID: DIO-09911
R1 R2 R11 R12 R21 R22 R31 R32 R41 R42 R51 R52 R61 R62 R71 R72 = SparkFun-Resistors; PROD_ID: RES-08698
R3 R18 R28 R38 R48 R58 R68 R78 = SparkFun-Resistors; PROD_ID: RES-07856
R4 R19 R29 R39 R49 R59 R69 R79 = SparkFun-Resistors; PROD_ID: RES-07864
R5 R17 R27 R37 R47 R57 R67 R77 = SparkFun-Resistors; PROD_ID: RES_10328
R6 R13 R23 R33 R43 R53 R63 R73 = SparkFun-Resistors; PROD_ID: RES-00824
R7 R20 R30 R40 R50 R60 R70 R80 = SparkFun-Resistors; PROD_ID: RES-07849
R8 R10 R14 R16 R24 R26 R34 R36 R44 R46 R54 R56 R64 R66 R74 R76 = SparkFun-Resistors; PROD_ID: RES-07863
R9 R15 R25 R35 R45 R55 R65 R75 = SparkFun-Resistors; PROD_ID: RES-07861
S1-S16 = SparkFun-Electromechanical; PROD_ID: SWCH-08441
SJ1-SJ16 TP1-TP80 = SparkFun-Passives
U1 U3 U5 U7 U9 U11 U13 U15 = sparkfun_photon_temp; PROD_ID: IC-12589
U2 U4 U6 U8 U10 U12 U14 U16 = SparkFun-PowerIC; PROD_ID: VREG-08170

## Nets
3.3V: C3.1 C4.1 C7.1 C8.1 C9.1 C10.1 C11.1 C12.1 D2.4 JP5.3.3V JP6.1 R3.2 R6.2 R7.2 U1.2 U1.3 U1.5 U1.26 U1.27 U2.2 U2.4
3.3V1: C13.1 C15.1 C18.1 C19.1 C20.1 C22.1 C23.1 C24.1 D4.4 JP9.3.3V JP10.1 R13.2 R18.2 R20.2 U3.2 U3.3 U3.5 U3.26 U3.27 U4.2 U4.4
3.3V2: C25.1 C27.1 C30.1 C31.1 C32.1 C34.1 C35.1 C36.1 D6.4 JP15.3.3V JP16.1 R23.2 R28.2 R30.2 U5.2 U5.3 U5.5 U5.26 U5.27 U6.2 U6.4
3.3V3: C37.1 C39.1 C42.1 C43.1 C44.1 C46.1 C47.1 C48.1 D8.4 JP21.3.3V JP22.1 R33.2 R38.2 R40.2 U7.2 U7.3 U7.5 U7.26 U7.27 U8.2 U8.4
3.3V4: C49.1 C51.1 C54.1 C55.1 C56.1 C58.1 C59.1 C60.1 D10.4 JP27.3.3V JP28.1 R43.2 R48.2 R50.2 U9.2 U9.3 U9.5 U9.26 U9.27 U10.2 U10.4
3.3V5: C61.1 C63.1 C66.1 C67.1 C68.1 C70.1 C71.1 C72.1 D12.4 JP33.3.3V JP34.1 R53.2 R58.2 R60.2 U11.2 U11.3 U11.5 U11.26 U11.27 U12.2 U12.4
3.3V6: C73.1 C75.1 C78.1 C79.1 C80.1 C82.1 C83.1 C84.1 D14.4 JP39.3.3V JP40.1 R63.2 R68.2 R70.2 U13.2 U13.3 U13.5 U13.26 U13.27 U14.2 U14.4
3.3V7: C85.1 C87.1 C90.1 C91.1 C92.1 C94.1 C95.1 C96.1 D16.4 JP45.3.3V JP46.1 R73.2 R78.2 R80.2 U15.2 U15.3 U15.5 U15.26 U15.27 U16.2 U16.4
!MODE: S2.3 U1.46
!MODE1: S4.3 U3.46
!MODE2: S6.3 U5.46
!MODE3: S8.3 U7.46
!MODE4: S10.3 U9.46
!MODE5: S12.3 U11.46
!MODE6: S14.3 U13.46
!MODE7: S16.3 U15.46
!RST: C2.1 JP5.RESET@1 JP6.15 R6.1 S1.3 U1.34
!RST1: C16.1 JP9.RESET@1 JP10.15 R13.1 S3.3 U3.34
!RST2: C28.1 JP15.RESET@1 JP16.15 R23.1 S5.3 U5.34
!RST3: C40.1 JP21.RESET@1 JP22.15 R33.1 S7.3 U7.34
!RST4: C52.1 JP27.RESET@1 JP28.15 R43.1 S9.3 U9.34
!RST5: C64.1 JP33.RESET@1 JP34.15 R53.1 S11.3 U11.34
!RST6: C76.1 JP39.RESET@1 JP40.15 R63.1 S13.3 U13.34
!RST7: C88.1 JP45.RESET@1 JP46.15 R73.1 S15.3 U15.34
A0: JP5.A0 U1.50
A1: JP5.A1 U1.43
A2: JP5.A2 JP5.D10 U1.49
A3: JP9.A2 JP9.D10 U3.49
A3/SPI_SCK: JP5.A3 JP5.D13 U1.22
A3/SPI_SCK1: JP9.A3 JP9.D13 U3.22
A3/SPI_SCK2: JP15.A3 JP15.D13 U5.22
A3/SPI_SCK3: JP21.A3 JP21.D13 U7.22
A3/SPI_SCK4: JP27.A3 JP27.D13 U9.22
A3/SPI_SCK5: JP33.A3 JP33.D13 U11.22
A3/SPI_SCK6: JP39.A3 JP39.D13 U13.22
A3/SPI_SCK7: JP45.A3 JP45.D13 U15.22
A4: JP9.A1 U3.43
A4/SPI_MISO: JP5.A4 JP5.D12 U1.21
A4/SPI_MISO1: JP9.A4 JP9.D12 U3.21
A4/SPI_MISO2: JP15.A4 JP15.D12 U5.21
A4/SPI_MISO3: JP21.A4 JP21.D12 U7.21
A4/SPI_MISO4: JP27.A4 JP27.D12 U9.21
A4/SPI_MISO5: JP33.A4 JP33.D12 U11.21
A4/SPI_MISO6: JP39.A4 JP39.D12 U13.21
A4/SPI_MISO7: JP45.A4 JP45.D12 U15.21
A5: JP9.A0 U3.50
A5/SPI_MOSI: JP5.A5 JP5.D11 U1.23
A5/SPI_MOSI1: JP9.A5 JP9.D11 U3.23
A5/SPI_MOSI2: JP15.A5 JP15.D11 U5.23
A5/SPI_MOSI3: JP21.A5 JP21.D11 U7.23
A5/SPI_MOSI4: JP27.A5 JP27.D11 U9.23
A5/SPI_MOSI5: JP33.A5 JP33.D11 U11.23
A5/SPI_MOSI6: JP39.A5 JP39.D11 U13.23
A5/SPI_MOSI7: JP45.A5 JP45.D11 U15.23
A6: JP15.A2 JP15.D10 U5.49
A7: JP15.A1 U5.43
A8: JP15.A0 U5.50
A9: JP21.A2 JP21.D10 U7.49
A10: JP21.A1 U7.43
A11: JP21.A0 U7.50
A12: JP27.A2 JP27.D10 U9.49
A13: JP27.A1 U9.43
A14: JP27.A0 U9.50
A15: JP33.A2 JP33.D10 U11.49
A16: JP33.A1 U11.43
A17: JP33.A0 U11.50
A18: JP39.A2 JP39.D10 U13.49
A19: JP39.A1 U13.43
A20: JP39.A0 U13.50
A21: JP45.A2 JP45.D10 U15.49
A22: JP45.A1 U15.43
A23: JP45.A0 U15.50
BTCX_RF_ACTIVE: TP3.P$1 U1.57
BTCX_RF_ACTIVE1: TP11.P$1 U3.57
BTCX_RF_ACTIVE2: TP21.P$1 U5.57
BTCX_RF_ACTIVE3: TP31.P$1 U7.57
BTCX_RF_ACTIVE4: TP41.P$1 U9.57
BTCX_RF_ACTIVE5: TP51.P$1 U11.57
BTCX_RF_ACTIVE6: TP61.P$1 U13.57
BTCX_RF_ACTIVE7: TP71.P$1 U15.57
BTCX_STATUS: TP2.P$1 U1.56
BTCX_STATUS1: TP13.P$1 U3.56
BTCX_STATUS2: TP23.P$1 U5.56
BTCX_STATUS3: TP33.P$1 U7.56
BTCX_STATUS4: TP43.P$1 U9.56
BTCX_STATUS5: TP53.P$1 U11.56
BTCX_STATUS6: TP63.P$1 U13.56
BTCX_STATUS7: TP73.P$1 U15.56
BTCX_TXCONF: TP1.P$1 U1.58
BTCX_TXCONF1: TP12.P$1 U3.58
BTCX_TXCONF2: TP22.P$1 U5.58
BTCX_TXCONF3: TP32.P$1 U7.58
BTCX_TXCONF4: TP42.P$1 U9.58
BTCX_TXCONF5: TP52.P$1 U11.58
BTCX_TXCONF6: TP62.P$1 U13.58
BTCX_TXCONF7: TP72.P$1 U15.58
D0/SDA: JP5.SDA U1.36
D0/SDA1: JP9.SDA U3.36
D0/SDA2: JP15.SDA U5.36
D0/SDA3: JP21.SDA U7.36
D0/SDA4: JP27.SDA U9.36
D0/SDA5: JP33.SDA U11.36
D0/SDA6: JP39.SDA U13.36
D0/SDA7: JP45.SDA U15.36
D1: JP9.D2 U3.45
D1/SCL: JP5.SCL U1.35
D1/SCL1: JP9.SCL U3.35
D1/SCL2: JP15.SCL U5.35
D1/SCL3: JP21.SCL U7.35
D1/SCL4: JP27.SCL U9.35
D1/SCL5: JP33.SCL U11.35
D1/SCL6: JP39.SCL U13.35
D1/SCL7: JP45.SCL U15.35
D2: JP5.D2 U1.45
D3: JP15.D2 U5.45
D3(JTAG_TRST): JP5.D3 JP6.3 U1.51
D3(JTAG_TRST)1: JP9.D3 JP10.3 U3.51
D3(JTAG_TRST)2: JP15.D3 JP16.3 U5.51
D3(JTAG_TRST)3: JP21.D3 JP22.3 U7.51
D3(JTAG_TRST)4: JP27.D3 JP28.3 U9.51
D3(JTAG_TRST)5: JP33.D3 JP34.3 U11.51
D3(JTAG_TRST)6: JP39.D3 JP40.3 U13.51
D3(JTAG_TRST)7: JP45.D3 JP46.3 U15.51
D4: JP21.D2 U7.45
D4(JTAG_TDO): JP5.D4 JP6.13 U1.52
D4(JTAG_TDO)1: JP9.D4 JP10.13 U3.52
D4(JTAG_TDO)2: JP15.D4 JP16.13 U5.52
D4(JTAG_TDO)3: JP21.D4 JP22.13 U7.52
D4(JTAG_TDO)4: JP27.D4 JP28.13 U9.52
D4(JTAG_TDO)5: JP33.D4 JP34.13 U11.52
D4(JTAG_TDO)6: JP39.D4 JP40.13 U13.52
D4(JTAG_TDO)7: JP45.D4 JP46.13 U15.52
D5: JP27.D2 U9.45
D5(JTAG_TDI): JP5.D5 JP6.5 U1.53
D5(JTAG_TDI)1: JP9.D5 JP10.5 U3.53
D5(JTAG_TDI)2: JP15.D5 JP16.5 U5.53
D5(JTAG_TDI)3: JP21.D5 JP22.5 U7.53
D5(JTAG_TDI)4: JP27.D5 JP28.5 U9.53
D5(JTAG_TDI)5: JP33.D5 JP34.5 U11.53
D5(JTAG_TDI)6: JP39.D5 JP40.5 U13.53
D5(JTAG_TDI)7: JP45.D5 JP46.5 U15.53
D6: JP33.D2 U11.45
D6(JTAG_TCK): JP5.D6 JP6.9 U1.55
D6(JTAG_TCK)1: JP9.D6 JP10.9 U3.55
D6(JTAG_TCK)2: JP15.D6 JP16.9 U5.55
D6(JTAG_TCK)3: JP21.D6 JP22.9 U7.55
D6(JTAG_TCK)4: JP27.D6 JP28.9 U9.55
D6(JTAG_TCK)5: JP33.D6 JP34.9 U11.55
D6(JTAG_TCK)6: JP39.D6 JP40.9 U13.55
D6(JTAG_TCK)7: JP45.D6 JP46.9 U15.55
D7: JP39.D2 U13.45
D7(JTAG_TMS): JP5.D7 JP6.7 R5.1 U1.54
D7(JTAG_TMS)1: JP9.D7 JP10.7 R17.1 U3.54
D7(JTAG_TMS)2: JP15.D7 JP16.7 R27.1 U5.54
D7(JTAG_TMS)3: JP21.D7 JP22.7 R37.1 U7.54
D7(JTAG_TMS)4: JP27.D7 JP28.7 R47.1 U9.54
D7(JTAG_TMS)5: JP33.D7 JP34.7 R57.1 U11.54
D7(JTAG_TMS)6: JP39.D7 JP40.7 R67.1 U13.54
D7(JTAG_TMS)7: JP45.D7 JP46.7 R77.1 U15.54
D8: JP45.D2 U15.45
D+: JP1.D+1 R2.1
D+1: JP7.D+1 R12.1
D+2: JP13.D+1 R22.1
D+3: JP19.D+1 R32.1
D+4: JP25.D+1 R42.1
D+5: JP31.D+1 R52.1
D+6: JP37.D+1 R62.1
D+7: JP43.D+1 R72.1
D-: JP1.D-1 R1.1
D-1: JP7.D-1 R11.1
D-2: JP13.D-1 R21.1
D-3: JP19.D-1 R31.1
D-4: JP25.D-1 R41.1
D-5: JP31.D-1 R51.1
D-6: JP37.D-1 R61.1
D-7: JP43.D-1 R71.1
DAC: JP5.D8 U1.24
DAC1: JP9.D8 U3.24
DAC2: JP15.D8 U5.24
DAC3: JP21.D8 U7.24
DAC4: JP27.D8 U9.24
DAC5: JP33.D8 U11.24
DAC6: JP39.D8 U13.24
DAC7: JP45.D8 U15.24
GND: C1.C C2.2 C3.2 C4.2 C5.2 C6.2 C7.2 C8.2 C9.2 C10.2 C11.2 C12.2 JP1.GND1 JP1.SHIELD1 JP1.SHIELD2 JP1.SHIELD3 JP2.GND JP2.GNDBREAK JP4.1 JP5.GND@1 JP5.GND@2 JP5.GND@3 JP6.4 JP6.6 JP6.8 JP6.10 JP6.11 JP6.12 JP6.14 JP6.16 JP6.18 JP6.20 R4.1 S1.1 S2.1 SJ1.1 SJ2.1 U1.1 U1.4 U1.6 U1.13 U1.15 U1.25 U1.28 U1.37 U1.39 U1.59 U1.65 U1.66 U1.67 U1.68 U1.69 U1.70 U1.71 U1.72 U1.73
GND1: C13.2 C14.C C15.2 C16.2 C17.2 C18.2 C19.2 C20.2 C21.2 C22.2 C23.2 C24.2 JP7.GND1 JP7.SHIELD1 JP7.SHIELD2 JP7.SHIELD3 JP8.GND JP8.GNDBREAK JP9.GND@1 JP9.GND@2 JP9.GND@3 JP10.4 JP10.6 JP10.8 JP10.10 JP10.11 JP10.12 JP10.14 JP10.16 JP10.18 JP10.20 JP12.1 R19.1 S3.1 S4.1 SJ3.1 SJ4.1 U3.1 U3.4 U3.6 U3.13 U3.15 U3.25 U3.28 U3.37 U3.39 U3.59 U3.65 U3.66 U3.67 U3.68 U3.69 U3.70 U3.71 U3.72 U3.73
GND2: C25.2 C26.C C27.2 C28.2 C29.2 C30.2 C31.2 C32.2 C33.2 C34.2 C35.2 C36.2 JP13.GND1 JP13.SHIELD1 JP13.SHIELD2 JP13.SHIELD3 JP14.GND JP14.GNDBREAK JP15.GND@1 JP15.GND@2 JP15.GND@3 JP16.4 JP16.6 JP16.8 JP16.10 JP16.11 JP16.12 JP16.14 JP16.16 JP16.18 JP16.20 JP18.1 R29.1 S5.1 S6.1 SJ5.1 SJ6.1 U5.1 U5.4 U5.6 U5.13 U5.15 U5.25 U5.28 U5.37 U5.39 U5.59 U5.65 U5.66 U5.67 U5.68 U5.69 U5.70 U5.71 U5.72 U5.73
GND3: C37.2 C38.C C39.2 C40.2 C41.2 C42.2 C43.2 C44.2 C45.2 C46.2 C47.2 C48.2 JP19.GND1 JP19.SHIELD1 JP19.SHIELD2 JP19.SHIELD3 JP20.GND JP20.GNDBREAK JP21.GND@1 JP21.GND@2 JP21.GND@3 JP22.4 JP22.6 JP22.8 JP22.10 JP22.11 JP22.12 JP22.14 JP22.16 JP22.18 JP22.20 JP24.1 R39.1 S7.1 S8.1 SJ7.1 SJ8.1 U7.1 U7.4 U7.6 U7.13 U7.15 U7.25 U7.28 U7.37 U7.39 U7.59 U7.65 U7.66 U7.67 U7.68 U7.69 U7.70 U7.71 U7.72 U7.73
GND4: C49.2 C50.C C51.2 C52.2 C53.2 C54.2 C55.2 C56.2 C57.2 C58.2 C59.2 C60.2 JP25.GND1 JP25.SHIELD1 JP25.SHIELD2 JP25.SHIELD3 JP26.GND JP26.GNDBREAK JP27.GND@1 JP27.GND@2 JP27.GND@3 JP28.4 JP28.6 JP28.8 JP28.10 JP28.11 JP28.12 JP28.14 JP28.16 JP28.18 JP28.20 JP30.1 R49.1 S9.1 S10.1 SJ9.1 SJ10.1 U9.1 U9.4 U9.6 U9.13 U9.15 U9.25 U9.28 U9.37 U9.39 U9.59 U9.65 U9.66 U9.67 U9.68 U9.69 U9.70 U9.71 U9.72 U9.73
GND5: C61.2 C62.C C63.2 C64.2 C65.2 C66.2 C67.2 C68.2 C69.2 C70.2 C71.2 C72.2 JP31.GND1 JP31.SHIELD1 JP31.SHIELD2 JP31.SHIELD3 JP32.GND JP32.GNDBREAK JP33.GND@1 JP33.GND@2 JP33.GND@3 JP34.4 JP34.6 JP34.8 JP34.10 JP34.11 JP34.12 JP34.14 JP34.16 JP34.18 JP34.20 JP36.1 R59.1 S11.1 S12.1 SJ11.1 SJ12.1 U11.1 U11.4 U11.6 U11.13 U11.15 U11.25 U11.28 U11.37 U11.39 U11.59 U11.65 U11.66 U11.67 U11.68 U11.69 U11.70 U11.71 U11.72 U11.73
GND6: C73.2 C74.C C75.2 C76.2 C77.2 C78.2 C79.2 C80.2 C81.2 C82.2 C83.2 C84.2 JP37.GND1 JP37.SHIELD1 JP37.SHIELD2 JP37.SHIELD3 JP38.GND JP38.GNDBREAK JP39.GND@1 JP39.GND@2 JP39.GND@3 JP40.4 JP40.6 JP40.8 JP40.10 JP40.11 JP40.12 JP40.14 JP40.16 JP40.18 JP40.20 JP42.1 R69.1 S13.1 S14.1 SJ13.1 SJ14.1 U13.1 U13.4 U13.6 U13.13 U13.15 U13.25 U13.28 U13.37 U13.39 U13.59 U13.65 U13.66 U13.67 U13.68 U13.69 U13.70 U13.71 U13.72 U13.73
GND7: C85.2 C86.C C87.2 C88.2 C89.2 C90.2 C91.2 C92.2 C93.2 C94.2 C95.2 C96.2 JP43.GND1 JP43.SHIELD1 JP43.SHIELD2 JP43.SHIELD3 JP44.GND JP44.GNDBREAK JP45.GND@1 JP45.GND@2 JP45.GND@3 JP46.4 JP46.6 JP46.8 JP46.10 JP46.11 JP46.12 JP46.14 JP46.16 JP46.18 JP46.20 JP48.1 R79.1 S15.1 S16.1 SJ15.1 SJ16.1 U15.1 U15.4 U15.6 U15.13 U15.15 U15.25 U15.28 U15.37 U15.39 U15.59 U15.65 U15.66 U15.67 U15.68 U15.69 U15.70 U15.71 U15.72 U15.73
MCU_USB_D+: R2.2 U1.61
MCU_USB_D+1: R12.2 U3.61
MCU_USB_D+2: R22.2 U5.61
MCU_USB_D+3: R32.2 U7.61
MCU_USB_D+4: R42.2 U9.61
MCU_USB_D+5: R52.2 U11.61
MCU_USB_D+6: R62.2 U13.61
MCU_USB_D+7: R72.2 U15.61
MCU_USB_D-: R1.2 U1.62
MCU_USB_D-1: R11.2 U3.62
MCU_USB_D-2: R21.2 U5.62
MCU_USB_D-3: R31.2 U7.62
MCU_USB_D-4: R41.2 U9.62
MCU_USB_D-5: R51.2 U11.62
MCU_USB_D-6: R61.2 U13.62
MCU_USB_D-7: R71.2 U15.62
N$1: TP10.P$1 U1.33
N$2: LED1.C SJ1.2
N$3: D2.2 R8.1
N$4: D2.1 R9.1
N$5: R19.2 R20.1 U4.1
N$6: LED1.A R3.1
N$7: LED2.A R5.2
N$8: LED2.C SJ2.2
N$9: D2.3 R10.1
N$10: D4.2 R16.1
N$11: D4.1 R15.1
N$12: LED3.A R17.2
N$13: LED4.A R18.1
N$14: TP20.P$1 U3.33
N$15: R4.2 R7.1 U2.1
N$16: LED4.C SJ3.2
N$17: LED3.C SJ4.2
N$18: D4.3 R14.1
N$19: R29.2 R30.1 U6.1
N$20: D6.2 R26.1
N$21: D6.1 R25.1
N$22: LED5.A R27.2
N$23: LED6.A R28.1
N$24: TP30.P$1 U5.33
N$25: LED6.C SJ5.2
N$26: LED5.C SJ6.2
N$27: D6.3 R24.1
N$28: R39.2 R40.1 U8.1
N$29: D8.2 R36.1
N$30: D8.1 R35.1
N$31: LED7.A R37.2
N$32: LED8.A R38.1
N$33: TP40.P$1 U7.33
N$34: LED8.C SJ7.2
N$35: LED7.C SJ8.2
N$36: D8.3 R34.1
N$37: R49.2 R50.1 U10.1
N$38: D10.2 R46.1
N$39: D10.1 R45.1
N$40: LED9.A R47.2
N$41: LED10.A R48.1
N$42: TP50.P$1 U9.33
N$43: LED10.C SJ9.2
N$44: LED9.C SJ10.2
N$45: D10.3 R44.1
N$46: R59.2 R60.1 U12.1
N$47: D12.2 R56.1
N$48: D12.1 R55.1
N$49: LED11.A R57.2
N$50: LED12.A R58.1
N$51: TP60.P$1 U11.33
N$52: LED12.C SJ11.2
N$53: LED11.C SJ12.2
N$54: D12.3 R54.1
N$55: R69.2 R70.1 U14.1
N$56: D14.2 R66.1
N$57: D14.1 R65.1
N$58: LED13.A R67.2
N$59: LED14.A R68.1
N$60: TP70.P$1 U13.33
N$61: LED14.C SJ13.2
N$62: LED13.C SJ14.2
N$63: D14.3 R64.1
N$64: R79.2 R80.1 U16.1
N$65: D16.2 R76.1
N$66: D16.1 R75.1
N$67: LED15.A R77.2
N$68: LED16.A R78.1
N$69: TP80.P$1 U15.33
N$70: LED16.C SJ15.2
N$71: LED15.C SJ16.2
N$72: D16.3 R74.1
RGB_BLUE: R10.2 U1.31
RGB_BLUE1: R14.2 U3.31
RGB_BLUE2: R24.2 U5.31
RGB_BLUE3: R34.2 U7.31
RGB_BLUE4: R44.2 U9.31
RGB_BLUE5: R54.2 U11.31
RGB_BLUE6: R64.2 U13.31
RGB_BLUE7: R74.2 U15.31
RGB_GREEN: R8.2 U1.32
RGB_GREEN1: R16.2 U3.32
RGB_GREEN2: R26.2 U5.32
RGB_GREEN3: R36.2 U7.32
RGB_GREEN4: R46.2 U9.32
RGB_GREEN5: R56.2 U11.32
RGB_GREEN6: R66.2 U13.32
RGB_GREEN7: R76.2 U15.32
RGB_RED: R9.2 U1.29
RGB_RED1: R15.2 U3.29
RGB_RED2: R25.2 U5.29
RGB_RED3: R35.2 U7.29
RGB_RED4: R45.2 U9.29
RGB_RED5: R55.2 U11.29
RGB_RED6: R65.2 U13.29
RGB_RED7: R75.2 U15.29
RX: JP5.D0 U1.63
RX1: JP9.D0 U3.63
RX2: JP15.D0 U5.63
RX3: JP21.D0 U7.63
RX4: JP27.D0 U9.63
RX5: JP33.D0 U11.63
RX6: JP39.D0 U13.63
RX7: JP45.D0 U15.63
SPARE1: JP3.6 U1.40
SPARE2: JP3.5 U1.41
SPARE3: JP3.4 U1.42
SPARE4: JP3.3 U1.44
SPARE5: JP3.2 U1.47
SPARE6: JP3.1 U1.48
SPARE7: JP11.6 U3.40
SPARE8: JP11.5 U3.41
SPARE9: JP11.4 U3.42
SPARE10: JP11.3 U3.44
SPARE11: JP11.2 U3.47
SPARE12: JP11.1 U3.48
SPARE13: JP17.6 U5.40
SPARE14: JP17.5 U5.41
SPARE15: JP17.4 U5.42
SPARE16: JP17.3 U5.44
SPARE17: JP17.2 U5.47
SPARE18: JP17.1 U5.48
SPARE19: JP23.6 U7.40
SPARE20: JP23.5 U7.41
SPARE21: JP23.4 U7.42
SPARE22: JP23.3 U7.44
SPARE23: JP23.2 U7.47
SPARE24: JP23.1 U7.48
SPARE25: JP29.6 U9.40
SPARE26: JP29.5 U9.41
SPARE27: JP29.4 U9.42
SPARE28: JP29.3 U9.44
SPARE29: JP29.2 U9.47
SPARE30: JP29.1 U9.48
SPARE31: JP35.6 U11.40
SPARE32: JP35.5 U11.41
SPARE33: JP35.4 U11.42
SPARE34: JP35.3 U11.44
SPARE35: JP35.2 U11.47
SPARE36: JP35.1 U11.48
SPARE37: JP41.6 U13.40
SPARE38: JP41.5 U13.41
SPARE39: JP41.4 U13.42
SPARE40: JP41.3 U13.44
SPARE41: JP41.2 U13.47
SPARE42: JP41.1 U13.48
SPARE43: JP47.6 U15.40
SPARE44: JP47.5 U15.41
SPARE45: JP47.4 U15.42
SPARE46: JP47.3 U15.44
SPARE47: JP47.2 U15.47
SPARE48: JP47.1 U15.48
TX: JP5.D1 U1.64
TX1: JP9.D1 U3.64
TX2: JP15.D1 U5.64
TX3: JP21.D1 U7.64
TX4: JP27.D1 U9.64
TX5: JP33.D1 U11.64
TX6: JP39.D1 U13.64
TX7: JP45.D1 U15.64
VBAT: C5.1 C6.1 JP4.2 U1.38
VBAT1: C17.1 C21.1 JP12.2 U3.38
VBAT2: C29.1 C33.1 JP18.2 U5.38
VBAT3: C41.1 C45.1 JP24.2 U7.38
VBAT4: C53.1 C57.1 JP30.2 U9.38
VBAT5: C65.1 C69.1 JP36.2 U11.38
VBAT6: C77.1 C81.1 JP42.2 U13.38
VBAT7: C89.1 C93.1 JP48.2 U15.38
VIN: C1.A D1.C JP2.PWR JP5.VIN U2.3
VIN1: C14.A D3.C JP8.PWR JP9.VIN U4.3
VIN2: C26.A D5.C JP14.PWR JP15.VIN U6.3
VIN3: C38.A D7.C JP20.PWR JP21.VIN U8.3
VIN4: C50.A D9.C JP26.PWR JP27.VIN U10.3
VIN5: C62.A D11.C JP32.PWR JP33.VIN U12.3
VIN6: C74.A D13.C JP38.PWR JP39.VIN U14.3
VIN7: C86.A D15.C JP44.PWR JP45.VIN U16.3
VUSB: D1.A JP1.VBUS1 JP5.5V
VUSB1: D3.A JP7.VBUS1 JP9.5V
VUSB2: D5.A JP13.VBUS1 JP15.5V
VUSB3: D7.A JP19.VBUS1 JP21.5V
VUSB4: D9.A JP25.VBUS1 JP27.5V
VUSB5: D11.A JP31.VBUS1 JP33.5V
VUSB6: D13.A JP37.VBUS1 JP39.5V
VUSB7: D15.A JP43.VBUS1 JP45.5V
WKP: JP5.D9 U1.30
WKP1: JP9.D9 U3.30
WKP2: JP15.D9 U5.30
WKP3: JP21.D9 U7.30
WKP4: JP27.D9 U9.30
WKP5: JP33.D9 U11.30
WKP6: JP39.D9 U13.30
WKP7: JP45.D9 U15.30
WL_JTAG_TCK: TP5.P$1 U1.17
WL_JTAG_TCK1: TP15.P$1 U3.17
WL_JTAG_TCK2: TP25.P$1 U5.17
WL_JTAG_TCK3: TP35.P$1 U7.17
WL_JTAG_TCK4: TP45.P$1 U9.17
WL_JTAG_TCK5: TP55.P$1 U11.17
WL_JTAG_TCK6: TP65.P$1 U13.17
WL_JTAG_TCK7: TP75.P$1 U15.17
WL_JTAG_TDI: TP4.P$1 U1.16
WL_JTAG_TDI1: TP14.P$1 U3.16
WL_JTAG_TDI2: TP24.P$1 U5.16
WL_JTAG_TDI3: TP34.P$1 U7.16
WL_JTAG_TDI4: TP44.P$1 U9.16
WL_JTAG_TDI5: TP54.P$1 U11.16
WL_JTAG_TDI6: TP64.P$1 U13.16
WL_JTAG_TDI7: TP74.P$1 U15.16
WL_JTAG_TDO: TP8.P$1 U1.20
WL_JTAG_TDO1: TP18.P$1 U3.20
WL_JTAG_TDO2: TP28.P$1 U5.20
WL_JTAG_TDO3: TP38.P$1 U7.20
WL_JTAG_TDO4: TP48.P$1 U9.20
WL_JTAG_TDO5: TP58.P$1 U11.20
WL_JTAG_TDO6: TP68.P$1 U13.20
WL_JTAG_TDO7: TP78.P$1 U15.20
WL_JTAG_TMS: TP7.P$1 U1.19
WL_JTAG_TMS1: TP17.P$1 U3.19
WL_JTAG_TMS2: TP27.P$1 U5.19
WL_JTAG_TMS3: TP37.P$1 U7.19
WL_JTAG_TMS4: TP47.P$1 U9.19
WL_JTAG_TMS5: TP57.P$1 U11.19
WL_JTAG_TMS6: TP67.P$1 U13.19
WL_JTAG_TMS7: TP77.P$1 U15.19
WL_JTAG_TRST: TP6.P$1 U1.18
WL_JTAG_TRST1: TP16.P$1 U3.18
WL_JTAG_TRST2: TP26.P$1 U5.18
WL_JTAG_TRST3: TP36.P$1 U7.18
WL_JTAG_TRST4: TP46.P$1 U9.18
WL_JTAG_TRST5: TP56.P$1 U11.18
WL_JTAG_TRST6: TP66.P$1 U13.18
WL_JTAG_TRST7: TP76.P$1 U15.18
WL_SLEEP_CLK: TP9.P$1 U1.60
WL_SLEEP_CLK1: TP19.P$1 U3.60
WL_SLEEP_CLK2: TP29.P$1 U5.60
WL_SLEEP_CLK3: TP39.P$1 U7.60
WL_SLEEP_CLK4: TP49.P$1 U9.60
WL_SLEEP_CLK5: TP59.P$1 U11.60
WL_SLEEP_CLK6: TP69.P$1 U13.60
WL_SLEEP_CLK7: TP79.P$1 U15.60

## Tracks (layer width: path | path; a pad name or v marks a point on that pad's centre or on a via)
3.3V  (via drill 0.51)
  Top 0.254: D2.4 29.75,22.64 29.72,22.61
  Top 0.305: C3.1 23.76,49.24 24.98,50.46 R6.2 | R3.2 31.11,20.19 29.72,21.59 29.72,22.61 v29.72,25.91
  Top 0.508: 23.71,25.91 v24.89,25.91 | 52.07,42.42 JP6.1 | 23.71,25.91 C4.1 23.76,27.18 C3.1 | R7.2 23.71,25.91 | U1.5 61.47,38.86 61.17,39.15 C7.1 C8.1 61.17,42.42 | v47.75,41.15 49.02,42.42 52.07,42.42 | 52.07,42.42 61.17,42.42 | 61.17,42.42 63.5,42.42 63.92,42 C12.1 C11.1 63.47,39.43 63.47,38.99 | U1.3 63.47,38.99 | U1.2 64.47,38.91 64.39,38.99 63.47,38.99 | v44.45,25.91 44.67,25.69 C9.1 C10.1 48.5,25.45 49.15,25.45 | 49.15,25.45 U1.27 | U1.26 49.44,26.45 49.28,26.29 49.28,25.57 49.15,25.45 | U2.2 23.71,25.91
  Bottom 0.508: JP5.3.3V 45.72,24.64 v44.45,25.91 v29.72,25.91 v24.89,25.91 24.89,35.56 30.48,41.15 v47.75,41.15
  other vias: 11.43,30.35 11.43,27.81 11.43,25.27 11.43,22.73 11.43,20.19 13.34,29.08 13.34,22.73 17.78,26.92 17.78,24.64 19.69,30.35 19.69,20.19
  pour Top (isolate 0.305): 10.16,30.99 20.32,30.99 20.32,19.56 10.16,19.56
  pour Bottom (isolate 0.305): 10.16,30.99 20.32,30.99 20.32,19.56 10.16,19.56
3.3V1  (via drill 0.51)
  Top 0.254: D4.4 102.14,22.64 102.11,22.61
  Top 0.305: C15.1 96.15,49.24 97.37,50.46 R13.2 | R18.2 103.5,20.19 102.11,21.59 102.11,22.61 v102.11,25.91
  Top 0.508: 96.1,25.91 v97.28,25.91 | 124.46,42.42 JP10.1 | 96.1,25.91 C13.1 96.15,27.18 C15.1 | R20.2 96.1,25.91 | U3.5 133.86,38.86 133.56,39.15 C18.1 C22.1 133.56,42.42 | v120.14,41.15 121.41,42.42 124.46,42.42 | 124.46,42.42 133.56,42.42 | 133.56,42.42 135.89,42.42 136.31,42 C24.1 C20.1 135.86,39.43 135.86,38.99 | U3.3 135.86,38.99 | U3.2 136.86,38.91 136.78,38.99 135.86,38.99 | v116.84,25.91 117.05,25.69 C23.1 C19.1 120.89,25.45 121.54,25.45 | 121.54,25.45 U3.27 | U3.26 121.83,26.45 121.67,26.29 121.67,25.57 121.54,25.45 | U4.2 96.1,25.91
  Bottom 0.508: JP9.3.3V 118.11,24.64 v116.84,25.91 v102.11,25.91 v97.28,25.91 97.28,35.56 102.87,41.15 v120.14,41.15
  other vias: 83.82,30.35 83.82,27.81 83.82,25.27 83.82,22.73 83.82,20.19 85.72,29.08 85.72,22.73 90.17,26.92 90.17,24.64 92.08,30.35 92.08,20.19
  pour Top (isolate 0.305): 82.55,30.99 92.71,30.99 92.71,19.56 82.55,19.56
  pour Bottom (isolate 0.305): 82.55,30.99 92.71,30.99 92.71,19.56 82.55,19.56
3.3V2  (via drill 0.51)
  Top 0.254: D6.4 174.53,22.64 174.5,22.61
  Top 0.305: C27.1 168.54,49.24 169.76,50.46 R23.2 | R28.2 175.9,20.19 174.5,21.59 174.5,22.61 v174.5,25.91
  Top 0.508: 168.49,25.91 v169.67,25.91 | 196.85,42.42 JP16.1 | 168.49,25.91 C25.1 168.54,27.18 C27.1 | R30.2 168.49,25.91 | U5.5 206.25,38.86 205.95,39.15 C30.1 C34.1 205.95,42.42 | v192.53,41.15 193.8,42.42 196.85,42.42 | 196.85,42.42 205.95,42.42 | 205.95,42.42 208.28,42.42 208.7,42 C36.1 C32.1 208.25,39.43 208.25,38.99 | U5.3 208.25,38.99 | U5.2 209.25,38.91 209.17,38.99 208.25,38.99 | v189.23,25.91 189.44,25.69 C35.1 C31.1 193.28,25.45 193.93,25.45 | 193.93,25.45 U5.27 | U5.26 194.22,26.45 194.06,26.29 194.06,25.57 193.93,25.45 | U6.2 168.49,25.91
  Bottom 0.508: JP15.3.3V 190.5,24.64 v189.23,25.91 v174.5,25.91 v169.67,25.91 169.67,35.56 175.26,41.15 v192.53,41.15
  other vias: 156.21,30.35 156.21,27.81 156.21,25.27 156.21,22.73 156.21,20.19 158.12,29.08 158.12,22.73 162.56,26.92 162.56,24.64 164.47,30.35 164.47,20.19
  pour Top (isolate 0.305): 154.94,30.99 165.1,30.99 165.1,19.56 154.94,19.56
  pour Bottom (isolate 0.305): 154.94,30.99 165.1,30.99 165.1,19.56 154.94,19.56
3.3V3  (via drill 0.51)
  Top 0.254: D8.4 246.92,22.64 246.89,22.61
  Top 0.305: C39.1 240.93,49.24 242.15,50.46 R33.2 | R38.2 248.28,20.19 246.89,21.59 246.89,22.61 v246.89,25.91
  Top 0.508: 240.88,25.91 v242.06,25.91 | 269.24,42.42 JP22.1 | 240.88,25.91 C37.1 240.93,27.18 C39.1 | R40.2 240.88,25.91 | U7.5 278.64,38.86 278.35,39.15 C42.1 C46.1 278.35,42.42 | v264.92,41.15 266.19,42.42 269.24,42.42 | 269.24,42.42 278.35,42.42 | 278.35,42.42 280.67,42.42 281.09,42 C48.1 C44.1 280.64,39.43 280.64,38.99 | U7.3 280.64,38.99 | U7.2 281.64,38.91 281.56,38.99 280.64,38.99 | v261.62,25.91 261.84,25.69 C47.1 C43.1 265.68,25.45 266.32,25.45 | 266.32,25.45 U7.27 | U7.26 266.61,26.45 266.45,26.29 266.45,25.57 266.32,25.45 | U8.2 240.88,25.91
  Bottom 0.508: JP21.3.3V 262.89,24.64 v261.62,25.91 v246.89,25.91 v242.06,25.91 242.06,35.56 247.65,41.15 v264.92,41.15
  other vias: 228.6,30.35 228.6,27.81 228.6,25.27 228.6,22.73 228.6,20.19 230.5,29.08 230.5,22.73 234.95,26.92 234.95,24.64 236.85,30.35 236.85,20.19
  pour Top (isolate 0.305): 227.33,30.99 237.49,30.99 237.49,19.56 227.33,19.56
  pour Bottom (isolate 0.305): 227.33,30.99 237.49,30.99 237.49,19.56 227.33,19.56
3.3V4  (via drill 0.51)
  Top 0.254: D10.4 29.75,82.33 29.72,82.3
  Top 0.305: C51.1 23.76,108.93 24.98,110.15 R43.2 | R48.2 31.11,79.88 29.72,81.28 29.72,82.3 v29.72,85.6
  Top 0.508: 23.71,85.6 v24.89,85.6 | 52.07,102.11 JP28.1 | 23.71,85.6 C49.1 23.76,86.87 C51.1 | R50.2 23.71,85.6 | U9.5 61.47,98.55 61.17,98.84 C54.1 C58.1 61.17,102.11 | v47.75,100.84 49.02,102.11 52.07,102.11 | 52.07,102.11 61.17,102.11 | 61.17,102.11 63.5,102.11 63.92,101.69 C60.1 C56.1 63.47,99.12 63.47,98.68 | U9.3 63.47,98.68 | U9.2 64.47,98.6 64.39,98.68 63.47,98.68 | v44.45,85.6 44.67,85.38 C59.1 C55.1 48.5,85.14 49.15,85.14 | 49.15,85.14 U9.27 | U9.26 49.44,86.14 49.28,85.98 49.28,85.27 49.15,85.14 | U10.2 23.71,85.6
  Bottom 0.508: JP27.3.3V 45.72,84.33 v44.45,85.6 v29.72,85.6 v24.89,85.6 24.89,95.25 30.48,100.84 v47.75,100.84
  other vias: 11.43,90.04 11.43,87.5 11.43,84.96 11.43,82.42 11.43,79.88 13.34,88.77 13.34,82.42 17.78,86.61 17.78,84.33 19.69,90.04 19.69,79.88
  pour Top (isolate 0.305): 10.16,90.68 20.32,90.68 20.32,79.25 10.16,79.25
  pour Bottom (isolate 0.305): 10.16,90.68 20.32,90.68 20.32,79.25 10.16,79.25
3.3V5  (via drill 0.51)
  Top 0.254: D12.4 102.14,82.33 102.11,82.3
  Top 0.305: C63.1 96.15,108.93 97.37,110.15 R53.2 | R58.2 103.5,79.88 102.11,81.28 102.11,82.3 v102.11,85.6
  Top 0.508: 96.1,85.6 v97.28,85.6 | 124.46,102.11 JP34.1 | 96.1,85.6 C61.1 96.15,86.87 C63.1 | R60.2 96.1,85.6 | U11.5 133.86,98.55 133.56,98.84 C66.1 C70.1 133.56,102.11 | v120.14,100.84 121.41,102.11 124.46,102.11 | 124.46,102.11 133.56,102.11 | 133.56,102.11 135.89,102.11 136.31,101.69 C72.1 C68.1 135.86,99.12 135.86,98.68 | U11.3 135.86,98.68 | U11.2 136.86,98.6 136.78,98.68 135.86,98.68 | v116.84,85.6 117.05,85.38 C71.1 C67.1 120.89,85.14 121.54,85.14 | 121.54,85.14 U11.27 | U11.26 121.83,86.14 121.67,85.98 121.67,85.27 121.54,85.14 | U12.2 96.1,85.6